# Altium PCB PCB.PcbDoc
Units mm, origin at the board's own origin, x right, y up, seen from the top; angles counter-clockwise.
Board outline 79.4 x 59.4 mm, 2 copper layers (Top Layer, Bottom Layer); 24 components, 0 nets, 128 pads, 16 vias.
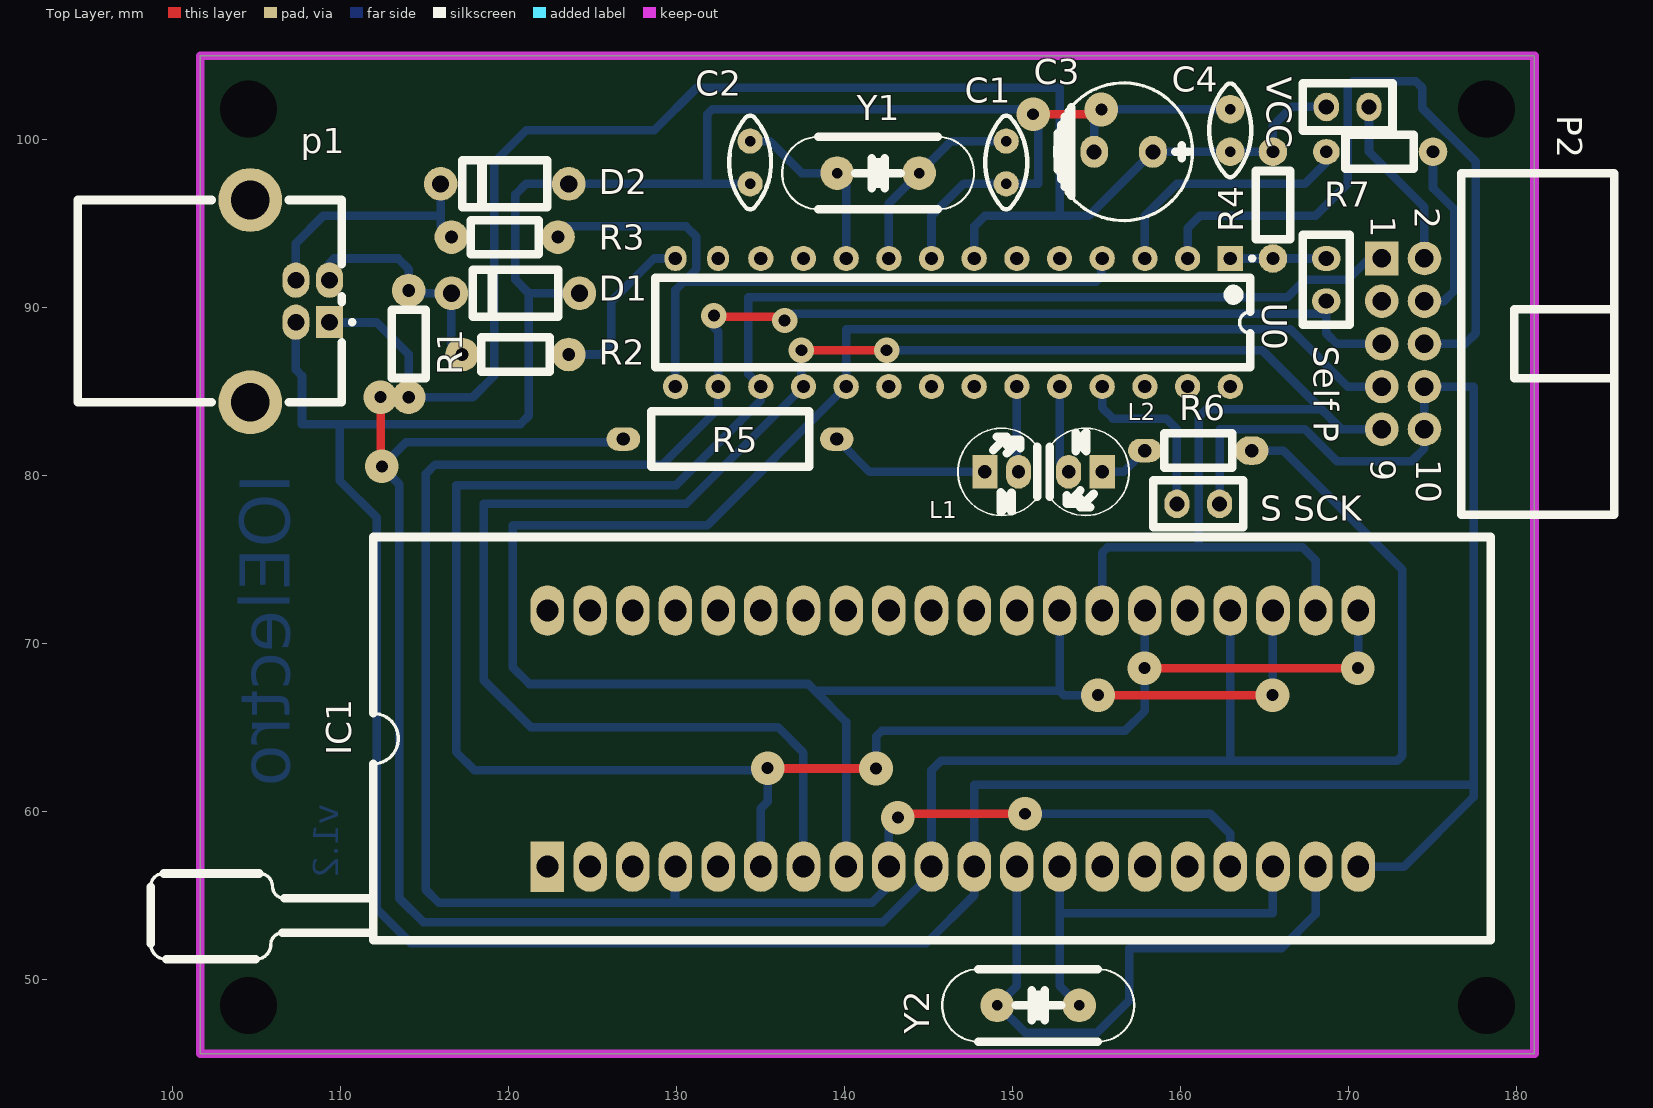
[diagram p0: Top Layer view]
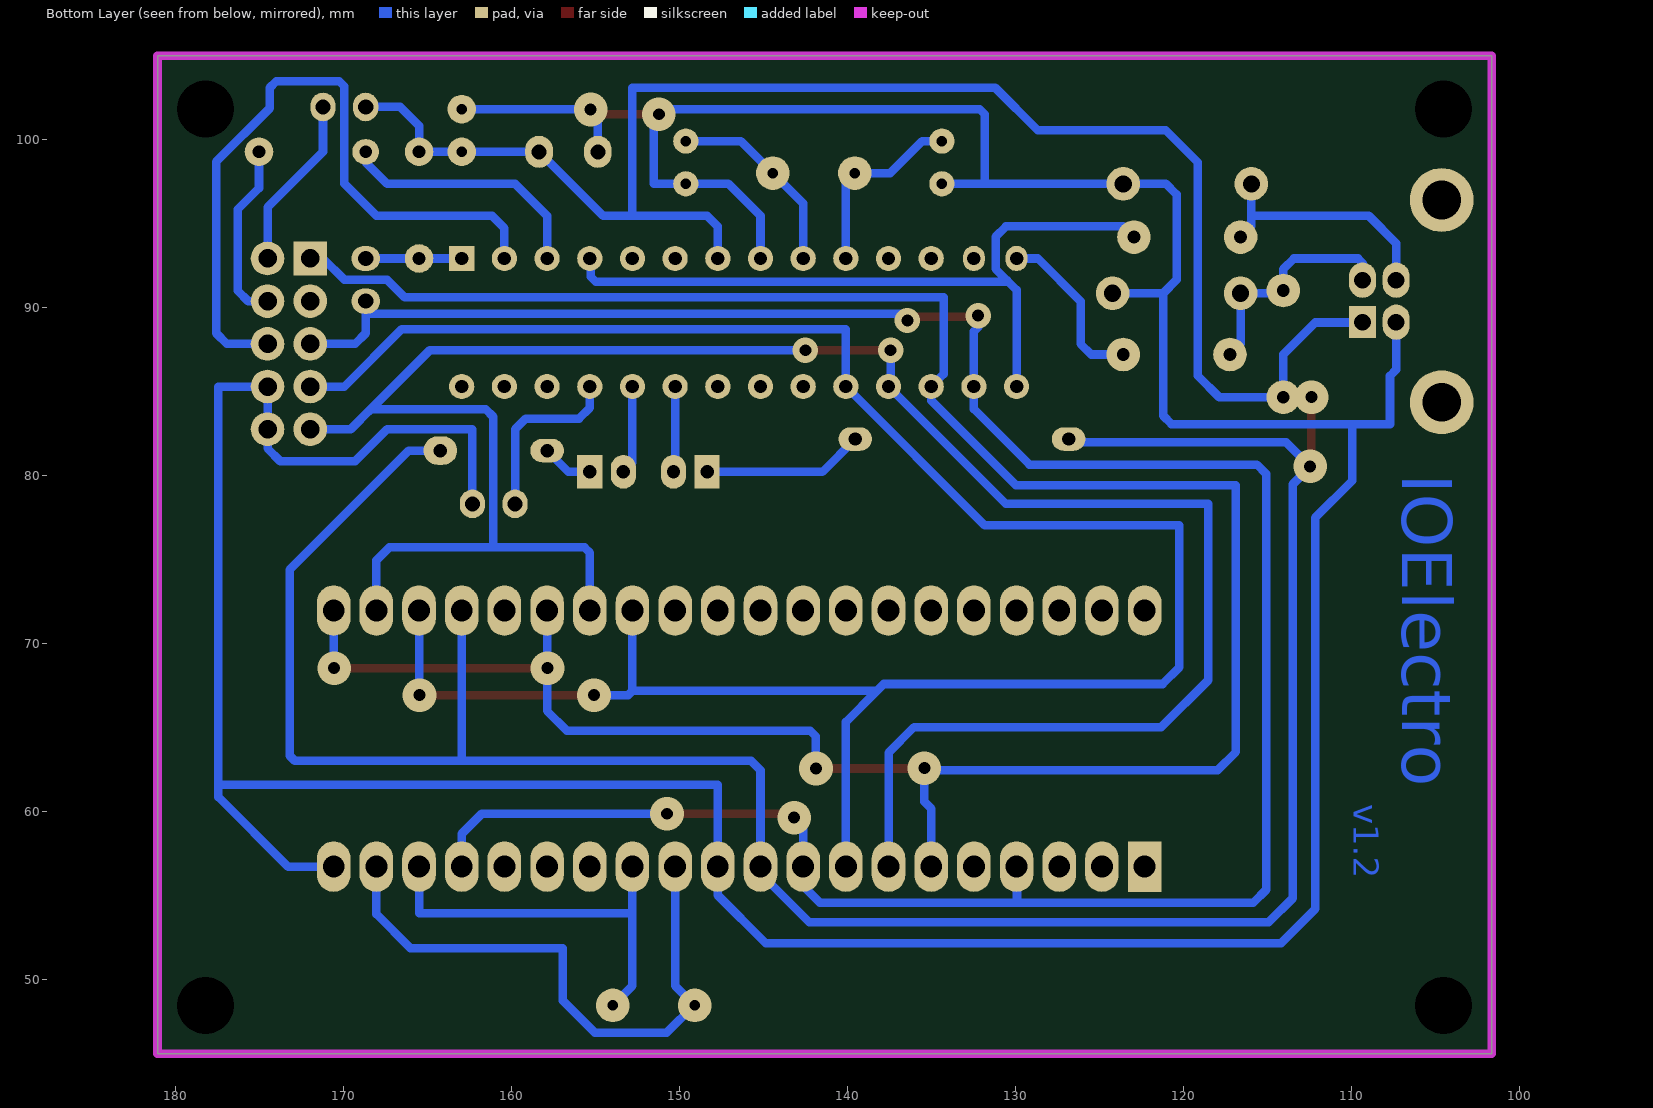
[diagram p1: Bottom Layer view, seen from below]

## Layer stack, top to bottom
Top Solder: solder mask 0.0102, Solder Resist, Dk 3.5
Top Layer: signal copper 0.0356
Dielectric 1: dielectric 0.32, FR-4, Dk 4.8
Bottom Layer: signal copper 0.0356
Bottom Solder: solder mask 0.0102, Solder Resist, Dk 3.5

## Board outline
101.646,45.614 181.046,45.614 181.046,105.014 101.646,105.014

## Design rules (kind name [scope] priority, off if disabled: settings)
Clearance [All] p1: gap=0.254 ignorepadtopadclearanceinfootprint=FALSE except(0: Arc-Hole Track-Hole SMDPad-Hole THPad-Hole Via-Hole Fill-Hole Poly-Hole Region-Hole Text-Hole)
PolygonConnect [All] p1: connectstyle=Relief reliefconductorwidth=0.254 reliefentries=4 polygonreliefangle="90 Angle" airgapwidth=0.254
RoutingVias [All] p1: holewidth=0.711 width=1.27 viastyle="Through Hole" minholewidth=0.711 minwidth=1.27 maxholewidth=0.711 maxwidth=1.27
SolderMaskExpansion [All] p1: expansion=0.102 istentingtop=FALSE
Width [All] p1: maxlimit=5 minlimit=0.254 preferedwidth=1
30 further rules are at their usual default settings.

## Components (designator, comment, footprint, x,y, rotation, side; value= is the part's Value field where it differs from the comment)
C1 "22pf" "Cap - 100nF"#1 149.606,98.654 r270 top
C2 "22pf" "Cap - 100nF"#1 134.366,98.654 r270 top
C3 "4.7uF" "cap 03" 156.591,99.289 r0 top
C4 "100nF" "Cap - 100nF"#2 162.941,100.559 r90 top
D1 "Diode Zener" "Diode 1W" 120.396,90.871 r180 top
D2 "Diode Zener" "Diode 1W" 119.761,97.384 r180 top
IC1 "Zip Socket" "DIP40 - Zip Socket" 146.431,64.364 r90 top
L1 "Red" LED-5mm 148.336,80.239 r0 top (schematic designator LED1)
L2 "Green" LED-5mm 155.321,80.239 r180 top (schematic designator LED2)
p1 "USB Connector" USB2.5-2H4E 108.331,90.399 r180 top
P2 "IDC 5X2" IDC2.54-H10C 176.276,87.859 r270 top
R1 "2.2K" Res-(1/4)#1 114.046,87.859 r90 top
R2 "68" Res-(1/4)#1 120.396,87.224 r0 top
R3 "68" Res-(1/4)#1 119.761,94.209 r0 top
R4 "10K" Res-(1/4)#2 165.481,96.114 r90 top
R5 "1K" Res-(1/2) 139.522,82.194 r180 top
R6 "1K" Res-(1/4)#3 161.036,81.509 r0 top
R7 "1K" Res-(1/4)#4 171.831,99.289 r0 top
"S SCK" "Pin Header" "Jumper Small - 2.54 - BLUE" 161.036,78.334 r0 top (schematic designator "Slow sck")
"Self P" "Pin Header" "Jumper Small - 2.54 - BLUE" 168.656,91.669 r270 top (schematic designator "self programing")
U0 "ATmega8A-PU" 28P3 146.431,89.129 r270 top
VCC "Pin Header" "Jumper Small - 2.54 - BLUE" 169.926,101.956 r0 top (schematic designator "vcc int")
Y1 "12 MHz" "XTAL Small" 141.986,98.019 r180 top
Y2 "12 MHz" "XTAL Small" 151.511,48.489 r0 top

## Footprints (in the part's own frame and the unit in brackets; to place one, negate y for a bottom-side part, rotate by r counter-clockwise, add the part's x,y. Pads: shape width x height; smd on the part's side, far side on the other; paste and mask are expansions set on the pad)
28P3 [mm] "DIP, 28-Leads, Row Spacing 7.62mm, Pitch 2.54mm, Body 34.67x7.3mm"
  rect 1.5x1.5 hole 0.8: 1(-3.81,16.51)
  round 1.5 hole 0.8: 2(-3.81,13.97) 3(-3.81,11.43) 4(-3.81,8.89) 5(-3.81,6.35) 6(-3.81,3.81) 7(-3.81,1.27) 8(-3.81,-1.27) 9(-3.81,-3.81) 10(-3.81,-6.35) 11(-3.81,-8.89) 12(-3.81,-11.43) 15(3.81,-16.51) 16(3.81,-13.97) 17(3.81,-11.43) 18(3.81,-8.89) 19(3.81,-6.35) 20(3.81,-3.81) 21(3.81,-1.27) 22(3.81,1.27) 23(3.81,3.81) 24(3.81,6.35) 25(3.81,8.89) 26(3.81,11.43) 27(3.81,13.97) 28(3.81,16.51)
  oval 1.5x1.3 hole 0.8: 13(-3.81,-13.97) 14(-3.81,-16.51)
  silkscreen extent -3.93,-17.7 2.65,17.94, body extent -3.6,-17.65 3.6,17.65, height 4.58
"cap 03" [mil]
  oval 65x75 hole 35: 1(68.9,0) 2(-68.9,0)
  silkscreen extent -161,-161 161,161, body extent -159,-159 157,158, height 473
"Cap - 100nF"#1 [mm]
  round 1.5 hole 0.635: 1(-1.27,0) 2(1.27,0)
  silkscreen extent -2.78,-1.25 2.79,1.25, body extent -2.92,-0.86 2.92,0.83, height 6.92
"Cap - 100nF"#2 [mm]
  round 1.7 hole 0.635: 1(-1.27,0) 2(1.27,0)
  silkscreen extent -2.78,-1.25 2.79,1.25, body extent -2.92,-0.86 2.92,0.83, height 6.92
"Diode 1W" [mm]
  round 2 hole 1.016: 1(-3.81,0) 2(3.81,0)
  silkscreen extent -2.54,-1.4 2.54,1.4, body extent -4.22,-1.33 4.19,1.33, height 3.33
"DIP40 - Zip Socket" [mm]
  rect 3x2 hole 1.3: 1(-7.62,24.13)
  oval 3x2 hole 1.3: 2(-7.62,21.59) 3(-7.62,19.05) 4(-7.62,16.51) 5(-7.62,13.97) 6(-7.62,11.43) 7(-7.62,8.89) 8(-7.62,6.35) 9(-7.62,3.81) 10(-7.62,1.27) 11(-7.62,-1.27) 12(-7.62,-3.81) 13(-7.62,-6.35) 14(-7.62,-8.89) 15(-7.62,-11.43) 16(-7.62,-13.97) 17(-7.62,-16.51) 18(-7.62,-19.05) 19(-7.62,-21.59) 20(-7.62,-24.13) 21(7.62,-24.13) 22(7.62,-21.59) 23(7.62,-19.05) 24(7.62,-16.51) 25(7.62,-13.97) 26(7.62,-11.43) 27(7.62,-8.89) 28(7.62,-6.35) 29(7.62,-3.81) 30(7.62,-1.27) 31(7.62,1.27) 32(7.62,3.81) 33(7.62,6.35) 34(7.62,8.89) 35(7.62,11.43) 36(7.62,13.97) 37(7.62,16.51) 38(7.62,19.05) 39(7.62,21.59) 40(7.62,24.13)
  silkscreen extent -13.13,-32 12,47.75, body extent -12.97,-31.48 11.5,41.58, height 21.95
IDC2.54-H10C [mm] "Connector; IDC, Low Profile Male Header, Thru-Hole; 10 Position; Right Angle; Pitch 2.54 mm; Body 20.32 x 8.9 x 9.2 mm (LxWxH)"
  rect 2x2 hole 1.1: 1(-5.08,-4.318)
  round 2 hole 1.1: 2(-5.08,-1.778) 3(-2.54,-4.318) 4(-2.54,-1.778) 5(0,-4.318) 6(0,-1.778) 7(2.54,-4.318) 8(2.54,-1.778) 9(5.08,-4.318) 10(5.08,-1.778)
  silkscreen extent -10.16,0.41 10.16,9.53, body extent -10.16,-4.62 10.16,134.5, height 9.1
"Jumper Small - 2.54 - BLUE" [mm]
  oval 1.5x1.7 hole 0.9: 1(-1.27,0) 2(1.27,0)
  silkscreen extent -2.67,-1.4 2.67,1.4, body extent -2.54,-1.27 2.54,1.27, height 8.57
LED-5mm [mm]
  rect 1.5x2 hole 0.8: 1(0,0)
  oval 1.5x2 hole 0.8: 2(2,0)
  silkscreen extent -1.6,-2.6 3.13,2.6
Res-(1/2) [mm]
  oval 2x1.4 hole 0.8: 1(0,0) 2(12.7,0)
  silkscreen extent 1.65,-1.65 11.05,1.65, body extent -0.31,-1.68 13.02,1.67, height 3.44
Res-(1/4)#1 [mm]
  round 2 hole 0.762: 1(-3.175,0) 2(3.175,0)
  silkscreen extent -2.03,-1.02 2.03,1.02, body extent -3.43,-0.93 3.43,0.91, height 2.92
Res-(1/4)#2 [mm]
  round 1.7 hole 0.762: 1(-3.175,0) 2(3.175,0)
  silkscreen extent -2.03,-1.02 2.03,1.02, body extent -3.43,-0.93 3.43,0.91, height 2.92
Res-(1/4)#3 [mm]
  oval 2x1.7 hole 0.8: 2(3.175,0)
  oval 2x1.4 hole 0.8: qq(-3.175,0)
  silkscreen extent -2.03,-1.02 2.03,1.02, body extent -3.43,-0.93 3.43,0.91, height 2.92
Res-(1/4)#4 [mm]
  oval 1.6x1.5 hole 0.762: 1(-3.175,0)
  round 1.7 hole 0.762: 2(3.175,0)
  silkscreen extent -2.03,-1.02 2.03,1.02, body extent -3.43,-0.93 3.43,0.91, height 2.92
USB2.5-2H4E [mm] "Connector; USB1.1, Type B, Thru-Hole; 4 Position; Right Angle"
  rect 1.6x1.9 hole 1: 1(-1,1.25)
  oval 1.6x2.1 hole 1: 2(-1,-1.25) 3(1,-1.25) 4(1,1.25)
  round 3.8 hole 2.3: 5(3.71,6.02) 6(3.71,-6.02)
  silkscreen extent -2.48,-6.02 13.99,6.02, body extent -2.5,-7.45 14,7.45, height 10.95
"XTAL Small" [mm]
  round 2 hole 0.635: 1(-2.44,0) 2(2.44,0)
  silkscreen extent -5.71,-2.16 5.71,2.16, body extent -5.75,-2.25 5.75,2.25, height 3.56

## Part data
C1 C2 C4: library part Cap-Bipolar, "Bipolar Capacitor", Voltage=100V, Adding Date=1387/12/20, Designer="Saeid Jorablo", Organazation=ControTec
C3: library part Cap-Polar, "Polar Capacitor", Voltage=16V, Adding Date=1387/12/20, Designer="Saeid Jorablo", Organazation=ControTec
D1 D2: "Zener Diode", Voltage="3.6 V", Company=E.P.I.L, Design Date=2011/11/02, Designer="Saeid Jorablo"
IC1: "40pin Zip/Zif Socket", Adding Date=11/25/2011, Company="ECI CO.", IC Pins=40
L1 L2: library part LED, "LED", Adding Date=1387/12/22, Designer="Saeid Jorablo", Organazation=ControTec, Size="SMD 1206"
  L1: Color=Red
  L2: Color=Green
p1: library part USB, "USB Connector-B Type", Adding Date=10/26/2010, Company="DASE Co", Designer="Eng. Saeid Jorablo"
P2: "Header, 5-Pin, Dual row", LatestRevisionDate=17-Jul-2002, LatestRevisionNote="Re-released for DXP Platform.", Publisher="Altium Limited"
R1 R2 R3 R4 R5 R6 R7: library part Resistor, "Resistor", Power="1/8 W", Tolerance=5%
"S SCK" "Self P" VCC: library part CON2
U0: "8-bit AVR Microcontroller, 8KB Flash, 512 Bytes EEPROM, 1KB SRAM, 28-pin PDIP, Industrial Grade (-40°C to 85°C)", Supplier Part Number 1=ATMEGA8A-PU-ND, ComponentLink1Description="Manufacturer Link", ComponentLink1URL=http://www.atmel.com/products/avr/default.asp?, ComponentLink2Description="ATmega8A Datasheet", ComponentLink2URL=http://www.atmel.com/dyn/resources/prod_documents/doc8159.pdf, ComponentLink3Description="ATmega8A Summary", ComponentLink3URL=http://www.atmel.com/dyn/resources/prod_documents/8159S.pdf, ComponentLink4Description="Atmel.com Home", ComponentLink4URL=http://www.atmel.com, DatasheetVersion="revC, Jul-2009", PackageDescription="28-lead (0.300\"/7.62mm Wide) Plastic Dual Inline Package (PDIP)", PackageReference=28P3, PackageVersion="revB, Sep-2001", Published=1-Apr-2010, Publisher="Altium Limited", Supplier 1=Digi-Key, Supplier 2=Farnell, Supplier 3=Mouser, Supplier Part Number 2=1748534, Supplier Part Number 3=556-ATMEGA8A-PU
Y1 Y2: library part XTAL, "XTAL Crystal", Company=E.P.I.L, Design Date=11/04/2011

## Free pads (board coordinates)
  round 0 hole 3.4 unplated: 0(104.521,101.829) 1(178.181,101.829) 2(178.181,48.489) 3(104.521,48.489)

## Via types
v1: diameter 2, hole 0.711, Top Layer to Bottom Layer, 12 vias
v2: diameter 1.5, hole 0.711, Top Layer to Bottom Layer, 4 vias

## Nets (pads, with @x,y where several pads share a name; then routed paths per layer and width w, separated by ;. In a path a pad name is that pad's centre, name@x,y a point inside that pad or via, vN(x,y) a via of type N, cw(c..) or ccw(c..) an arc to the next point about the centre after c; other vN are vias at no path point)
pads on no net: "S SCK.1" "S SCK.2" "Self P.1" "Self P.2" C1.1 C1.2 C2.1 C2.2 C3.1 C3.2 C4.1 C4.2 D1.1 D1.2 D2.1 D2.2 IC1.1 IC1.2 IC1.3 IC1.4 IC1.5 IC1.6 IC1.7 IC1.8 IC1.9 IC1.10 IC1.11 IC1.12 IC1.13 IC1.14 IC1.15 IC1.16 IC1.17 IC1.18 IC1.19 IC1.20 IC1.21 IC1.22 IC1.23 IC1.24 IC1.25 IC1.26 IC1.27 IC1.28 IC1.29 IC1.30 IC1.31 IC1.32 IC1.33 IC1.34 IC1.35 IC1.36 IC1.37 IC1.38 IC1.39 IC1.40 L1.1 L1.2 L2.1 L2.2 p1.1 p1.2 p1.3 p1.4 p1.5 p1.6 P2.1 P2.2 P2.3 P2.4 P2.5 P2.6 P2.7 P2.8 P2.9 P2.10 R1.1 R1.2 R2.1 R2.2 R3.1 R3.2 R4.1 R4.2 R5.1 R5.2 R6.2 R6.qq R7.1 R7.2 U0.1 U0.2 U0.3 U0.4 U0.5 U0.6 U0.7 U0.8 U0.9 U0.10 U0.11 U0.12 U0.13 U0.14 U0.15 U0.16 U0.17 U0.18 U0.19 U0.20 U0.21 U0.22 U0.23 U0.24 U0.25 U0.26 U0.27 U0.28 VCC.1 VCC.2 Y1.1 Y1.2 Y2.1 Y2.2
copper on no net: | length 1363.9
  Top Layer w0.508: v1(112.37,84.684) 112.37,80.645 v1(112.446,80.569) ; v2(132.207,89.535) 132.258,89.484 136.55,89.484 136.423,89.357 v2(136.423,89.256) ; v1(135.407,62.611) 135.433,62.586 v1(141.859,62.586) ; v2(137.414,87.478) v2(142.494,87.478) ; v1(143.154,59.665) 143.383,59.893 v1(150.724,59.893) ; v1(151.206,101.524) 154.991,101.524 v1(155.27,101.803) ; v1(155.067,66.954) v1(165.456,66.954) ; v1(157.836,68.555) v1(170.536,68.555)
  Bottom Layer w0.508: 107.331,89.149 107.331,86.319 107.696,85.954 107.696,83.083 109.957,83.083 ; 107.331,91.649 107.331,93.844 108.966,95.479 115.951,95.479 ; 109.331,89.149 109.351,89.129 112.141,89.129 114.046,87.224 114.046,84.684 ; 109.331,91.649 109.331,92.669 109.601,92.939 113.411,92.939 114.046,92.304 114.046,91.034 114.209,90.871 116.586,90.871 116.586,87.859 117.221,87.224 ; v1(112.37,84.684) 114.046,84.684 ; 115.951,97.384 115.951,95.479 ; 116.586,94.209 115.951,94.844 115.951,95.479 ; 122.936,94.209 123.571,94.844 130.556,94.844 131.171,94.229 131.171,92.321 130.487,91.636 ; 123.571,87.224 125.476,87.224 126.111,87.859 126.111,90.399 128.651,92.939 129.921,92.939 ; 124.206,90.871 121.194,90.871 ; 126.822,82.194 126.619,81.991 113.868,81.991 v1(112.446,80.569) 112.446,80.543 113.487,79.502 113.487,54.864 114.91,53.442 142.265,53.442 145.161,56.337 145.161,56.744 145.161,62.484 145.72,63.043 162.814,63.043 172.88,63.043 173.177,63.34 173.177,74.422 166.091,81.509 164.211,81.509 ; 129.896,56.718 129.896,54.61 ; 129.921,85.319 129.921,91.071 130.487,91.636 ; v2(132.207,89.535) 132.207,88.849 132.461,88.595 132.461,85.319 132.461,83.972 129.159,80.67 115.621,80.67 115.062,80.112 115.062,55.372 115.824,54.61 129.896,54.61 ; 134.366,97.384 131.826,97.384 ; 134.366,99.924 135.534,99.924 137.439,98.019 139.546,98.019 140.081,97.484 140.081,92.939 ; 135.001,56.744 135.001,60.198 135.407,60.604 v1(135.407,62.611) 135.28,62.484 117.958,62.484 116.865,63.576 116.865,79.451 129.972,79.451 135.001,84.48 135.001,85.319 134.264,86.055 134.264,90.627 145.263,90.627 166.345,90.627 167.386,91.669 169.926,91.669 171.196,92.939 171.958,92.939 ; v2(136.423,89.256) 136.423,89.357 136.703,89.637 144.691,89.637 166.522,89.637 168.656,89.637 ; 137.414,85.446 v2(137.414,87.478) ; 137.541,56.744 137.541,63.525 136.017,65.049 121.31,65.049 118.516,67.843 118.516,78.334 130.556,78.334 137.541,85.319 ; 139.522,82.194 141.478,80.239 148.336,80.239 ; 140.081,56.744 140.081,65.354 138.227,67.208 ; v1(141.859,62.586) 141.859,64.491 142.215,64.846 147.46,64.846 156.693,64.846 157.861,66.015 157.861,68.555 157.861,71.984 ; v2(142.494,87.478) 164.846,87.478 168.504,83.82 ; 142.621,92.939 142.621,96.214 144.426,98.019 146.331,99.924 149.606,99.924 ; v1(143.154,59.665) 143.154,59.69 142.621,59.157 142.621,56.744 142.621,55.601 141.63,54.61 129.896,54.61 ; 145.161,92.939 145.161,95.479 147.066,97.384 149.606,97.384 151.511,97.384 v1@151.511,101.829 ; 147.701,92.939 147.701,94.844 148.336,95.479 152.781,95.479 ; 149.071,48.489 150.241,49.659 150.241,56.744 ; 149.097,48.515 150.749,46.863 155.016,46.863 156.921,48.768 156.921,51.892 165.989,51.892 168.021,53.924 168.021,56.744 ; 150.241,85.319 150.241,80.334 150.336,80.239 ; v1(150.724,59.893) 161.747,59.893 162.941,58.699 162.941,56.744 ; v1(151.206,101.524) v1@151.511,101.829 ; 152.781,56.744 152.781,53.975 ; 152.781,67.259 152.781,71.984 ; 152.781,85.319 152.781,80.779 153.321,80.239 ; 153.951,48.489 152.781,49.659 152.781,53.975 ; 154.841,99.289 v1@154.841,101.349 ; v1(155.067,66.954) 153.035,66.954 152.781,67.208 138.227,67.208 ; v1(155.27,101.803) v1@155.296,101.829 ; v1@155.308,101.816 155.321,101.829 162.941,101.829 ; 155.321,71.984 155.321,75.438 155.626,75.743 161.061,75.743 ; 155.321,80.239 156.591,80.239 157.861,81.509 ; 155.321,85.319 155.321,84.049 155.956,83.414 159.131,83.414 159.766,82.779 159.766,78.334 ; 155.321,92.939 155.273,92.89 155.273,91.865 154.975,91.567 130.556,91.567 130.487,91.636 ; 157.861,92.939 157.861,95.479 159.766,97.384 167.386,97.384 168.656,98.654 168.656,99.289 ; 160.401,92.939 160.401,94.742 161.138,95.479 168.021,95.479 169.926,97.384 169.926,103.182 170.224,103.48 173.99,103.48 174.371,103.099 174.371,101.879 177.546,98.704 177.546,88.494 176.911,87.859 174.498,87.859 ; 162.306,78.334 162.306,82.779 167.386,82.779 169.291,80.874 173.736,80.874 174.498,81.636 174.498,82.779 174.498,85.319 177.419,85.319 177.419,61.62 177.419,60.884 173.279,56.744 170.561,56.744 ; 162.941,63.043 162.941,71.984 ; 162.941,92.939 165.481,92.939 168.656,92.939 ; 165.171,71.984 165.481,71.984 165.481,66.98 v1(165.456,66.954) ; 165.481,56.744 165.481,53.975 152.781,53.975 ; 168.021,71.984 168.021,74.981 167.259,75.743 161.061,75.743 ; 168.656,90.399 168.656,89.637 ; 168.656,101.956 166.599,101.956 165.481,100.838 165.481,99.289 162.941,99.289 158.341,99.289 154.531,95.479 152.781,95.479 ; v1(170.536,68.555) 170.561,68.58 170.561,71.984 ; 171.196,102.464 171.196,99.289 174.498,95.987 174.498,92.939 ; 171.958,82.779 169.545,82.779 168.351,83.972 161.519,83.972 161.061,83.515 161.061,75.743 ; 171.958,85.319 169.926,85.319 166.522,88.722 143.358,88.722 140.081,88.722 140.081,85.319 131.826,77.064 120.244,77.064 120.244,68.605 121.234,67.615 137.82,67.615 138.227,67.208 ; 171.958,87.859 169.291,87.859 168.656,88.494 168.656,89.637 ; 174.498,90.399 175.641,90.399 176.276,91.034 176.276,95.86 175.006,97.13 175.006,99.289 ; 177.394,61.62 147.701,61.62 147.701,56.744 147.701,55.042 144.856,52.197 114.173,52.197 112.141,54.229 112.141,77.521 109.957,79.705 109.957,83.083 ; 109.957,83.083 120.701,83.083 121.194,83.576 121.194,90.871 ; 114.046,84.684 117.856,84.684 119.126,85.954 119.126,98.654 121.031,100.559 128.651,100.559 131.191,103.099 152.781,103.099 152.781,95.479 ; 121.194,90.871 120.396,91.669 120.396,96.749 121.031,97.384 123.571,97.384 131.826,97.384 ; 131.826,97.384 131.826,101.531 132.124,101.829 v1@151.511,101.829

## Keep-outs
Keep-Out Layer:
  the board outline again, w0.508

## Other copper
Bottom Layer:
  text "IOElectro" at 107.95,80.137 h5.08 r90
  text "v1.2" at 110.363,60.452 h2.54 r90

## Text inside footprints (layer, text, board x,y; h text height)
P2: Top Overlay "9" at 171.29,80.993 h1.5 r270; Top Overlay "10" at 174.015,80.993 h1.5 r270; Top Overlay "1" at 171.29,95.483 h1.5 r270; Top Overlay "2" at 173.92,95.983 h1.5 r270